# Altium PCB PCB_TestBoard.PcbDoc
Units mm, origin at the board's own origin, x right, y up, seen from the top; angles counter-clockwise.
Board outline 65 x 50 mm, 2 copper layers (Top Layer, Bottom Layer); 7 components, 65 nets, 151 pads, 16 vias.
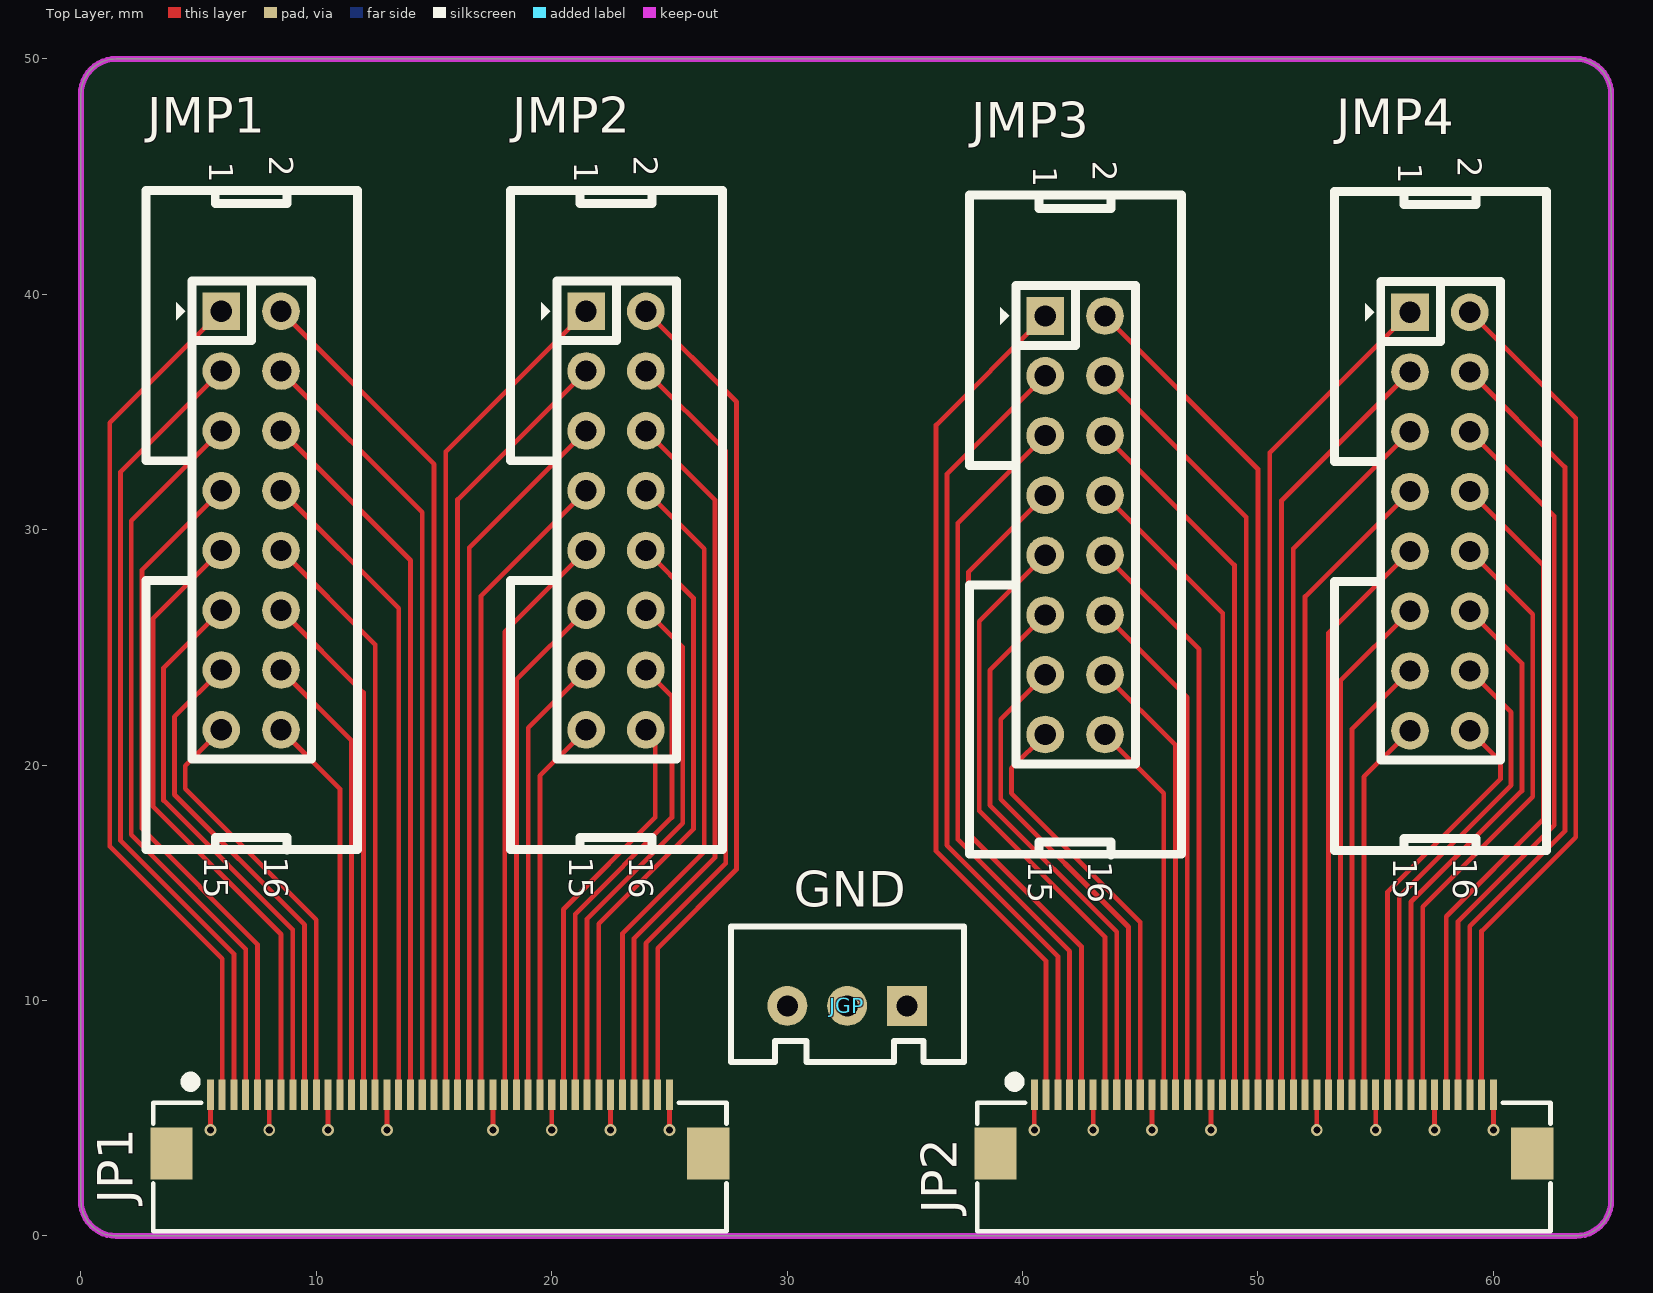
[diagram p0: Top Layer view]
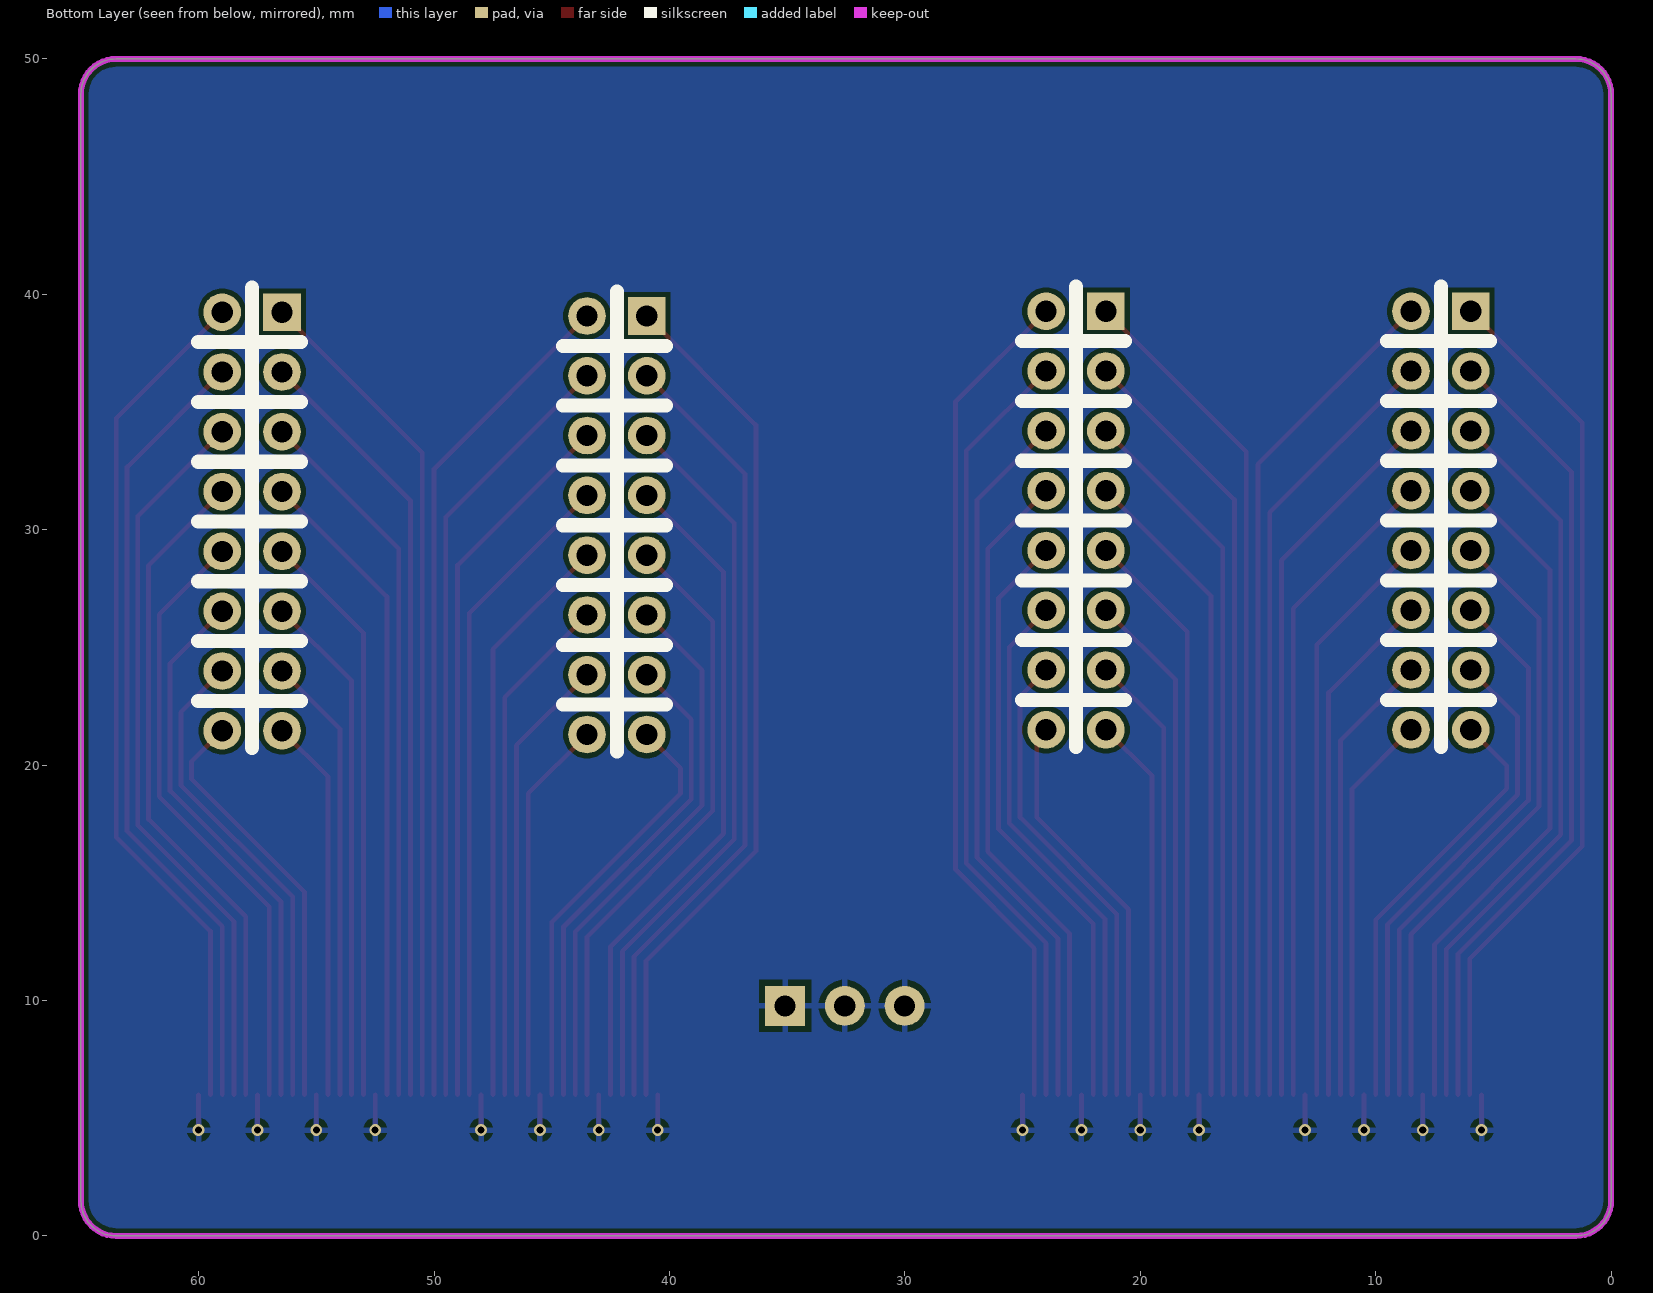
[diagram p1: Bottom Layer view, seen from below]
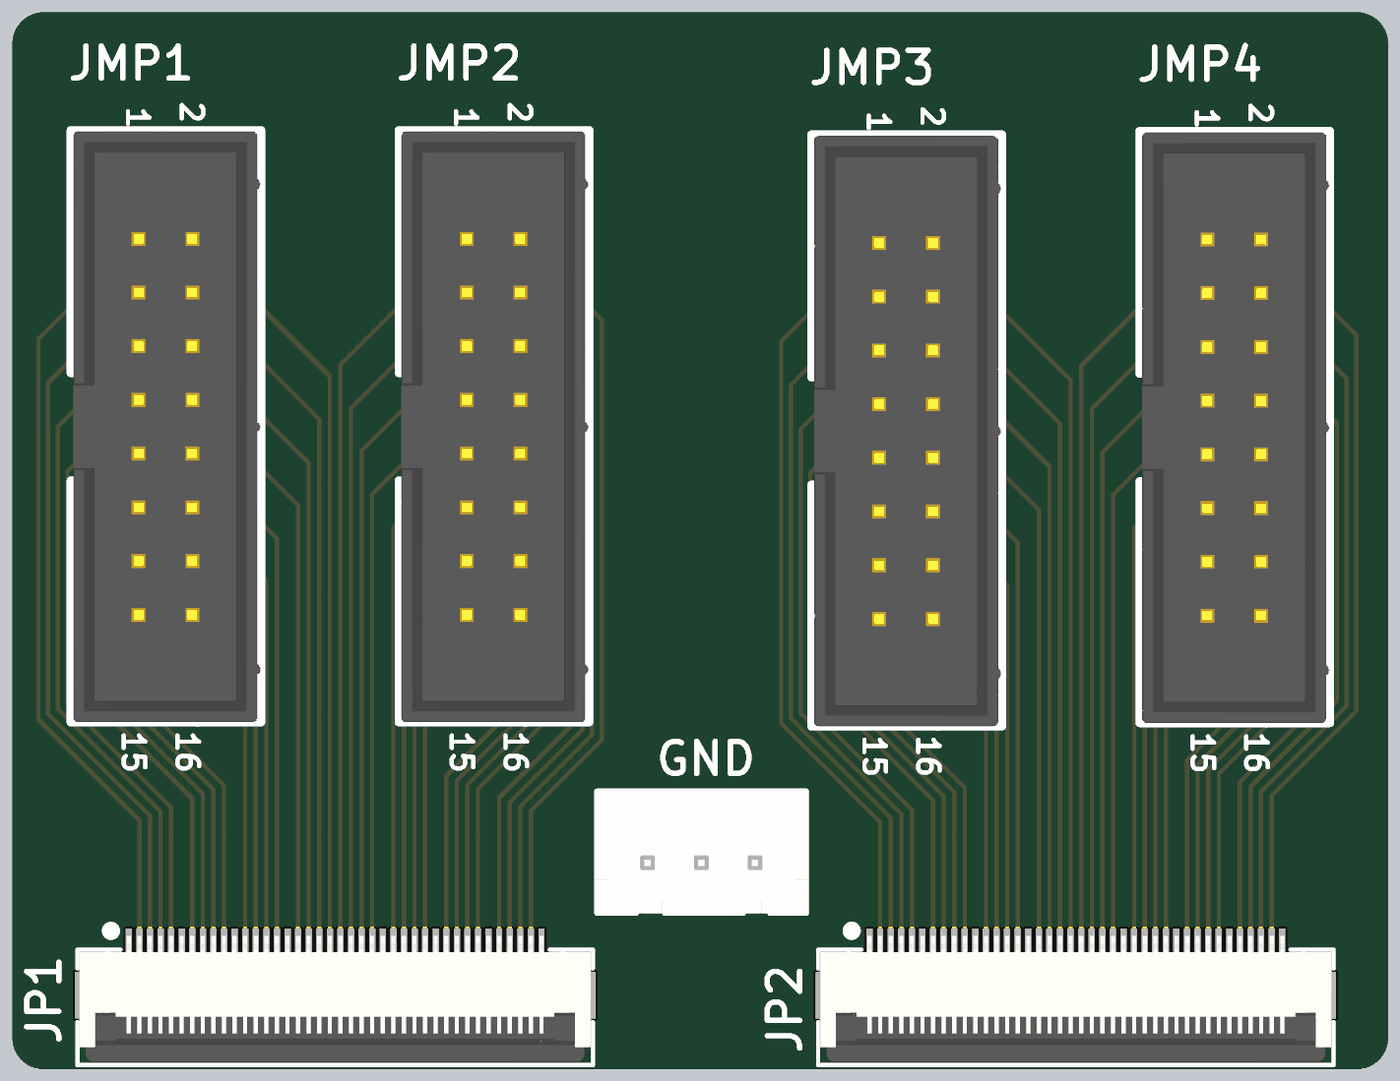
[diagram p2: 3D render of the assembled board from above, using the file's embedded part models]

## Layer stack, top to bottom
Top Solder: solder mask 0.0102, Solder Resist, Dk 3.5
Top Layer: signal copper 0.0356
Dielectric 1: dielectric 0.32, FR-4, Dk 4.8
Bottom Layer: signal copper 0.0356
Bottom Solder: solder mask 0.0102, Solder Resist, Dk 3.5

## Board outline
0,1.5 0,48.5 cw(c1.5,48.5) 1.5,50 63.5,50 cw(c63.5,48.5) 65,48.5 65,1.5 cw(c63.5,1.5) 63.5,0 1.5,0 cw(c1.5,1.5)

## Design rules (kind name [scope] priority, off if disabled: settings)
Clearance [All] p1: gap=0.203 ignorepadtopadclearanceinfootprint=TRUE except(0.254: Arc-Arc Arc-Track Track-Track)
HoleSize [All] p1: absolutevalues=TRUE maxlimit=3 minlimit=0.3 maxpercent=80.000 minpercent=20.000
PolygonConnect [All] p1: connectstyle=Relief reliefconductorwidth=0.254 reliefentries=4 polygonreliefangle="90 Angle" airgapwidth=0.254
RoutingVias [All] p1: holewidth=0.4 width=0.6 viastyle="Through Hole" minholewidth=0.3 minwidth=0.5 maxholewidth=3 maxwidth=3.3
SolderMaskExpansion [All] p1: expansion=0.102 istentingtop=FALSE
Width [All] p1: maxlimit=2.54 minlimit=0.203 preferedwidth=0.254
29 further rules are at their usual default settings.

## Components (designator, comment, footprint, x,y, rotation, side; value= is the part's Value field where it differs from the comment)
JGP "HDR-1X3" XH2.54-LI-3P 32.55,9.775 r180 top
JMP1 "Header 8X2" IDC2.54-LI-2x8P 5.96,39.28 r270 top
JMP2 "Header 8X2" IDC2.54-LI-2x8P 21.46,39.28 r270 top
JMP3 "Header 8X2" IDC2.54-LI-2x8P 40.96,39.08 r270 top
JMP4 "Header 8X2" IDC2.54-LI-2x8P 56.46,39.24 r270 top
JP1 "FPC-0.5mm-40P" "FPC0.5 2H-WS-40P" 15.25,3.503 r0 top
JP2 "FPC-0.5mm-40P" "FPC0.5 2H-WS-40P" 50.25,3.503 r0 top

## Footprints (in the part's own frame and the unit in brackets; to place one, negate y for a bottom-side part, rotate by r counter-clockwise, add the part's x,y. Pads: shape width x height; smd on the part's side, far side on the other; paste and mask are expansions set on the pad)
"FPC0.5 2H-WS-40P" [mm] "长：24.2mm，宽：5.2mm，高：2mm 淘宝ID:黄晶宝石   店铺网址:https://shop463601444.taobao.com"
  rect 1.8x2.2 smd: 0(-11.4,0) 0(11.4,0)
  rect 0.3x1.3 smd: 1(-9.75,2.497) 2(-9.25,2.497) 3(-8.75,2.497) 4(-8.25,2.497) 5(-7.75,2.497) 6(-7.25,2.497) 7(-6.75,2.497) 8(-6.25,2.497) 9(-5.75,2.497) 10(-5.25,2.497) 11(-4.75,2.497) 12(-4.25,2.497) 13(-3.75,2.497) 14(-3.25,2.497) 15(-2.75,2.497) 16(-2.25,2.497) 17(-1.75,2.497) 18(-1.25,2.497) 19(-0.75,2.497) 20(-0.25,2.497) 21(0.25,2.497) 22(0.75,2.497) 23(1.25,2.497) 24(1.75,2.497) 25(2.25,2.497) 26(2.75,2.497) 27(3.25,2.497) 28(3.75,2.497) 29(4.25,2.497) 30(4.75,2.497) 31(5.25,2.497) 32(5.75,2.497) 33(6.25,2.497) 34(6.75,2.497) 35(7.25,2.497) 36(7.75,2.497) 37(8.25,2.497) 38(8.75,2.497) 39(9.25,2.497) 40(9.75,2.497)
  silkscreen extent -12.17,-3.3 12.17,3.23, body extent -12.1,-3.15 12.1,2.85, height 2
IDC2.54-LI-2x8P [mm] "16P简易牛角座 淘宝ID:黄晶宝石   店铺网址:https://shop463601444.taobao.com"
  rect 1.6x1.6 hole 0.9: 1(0,0)
  round 1.6 hole 0.9: 2(0,2.54) 3(2.54,0) 4(2.54,2.54) 5(5.08,0) 6(5.08,2.54) 7(7.62,0) 8(7.62,2.54) 9(10.16,0) 10(10.16,2.54) 11(12.7,0) 12(12.7,2.54) 13(15.24,0) 14(15.24,2.54) 15(17.78,0) 16(17.78,2.54)
  silkscreen extent -5.14,-3.2 22.89,5.8, body extent -5.08,-3.08 22.86,5.77, height 9.17
XH2.54-LI-3P [mm] "接插件，3P  淘宝ID:黄晶宝石   店铺网址:https://shop463601444.taobao.com"
  rect 1.7x1.7 hole 0.9: 1(-2.54,0)
  round 1.7 hole 0.9: 2(0,0) 3(2.54,0)
  silkscreen extent -4.95,-3.38 4.93,2.39, body extent -5.04,-3.3 5.04,2.4, height 7.03

## Part data
JGP: library part "Header 3", "3P接插件", BOM名称=3P接插件, 学习资源=https://shop463601444.taobao.com, 版权归属="封装库来自淘宝 ID：黄晶宝石"
JMP1 JMP2 JMP3 JMP4: "8*2P接插件", BOM名称=8*2P接插件, 学习资源=https://shop463601444.taobao.com, 版权归属="封装库来自淘宝 ID：黄晶宝石"
JP1 JP2: "FPC Connector 0.5mm 40PIN"

## Via types
v1: diameter 0.5, hole 0.3, Top Layer to Bottom Layer, tented both sides, 16 vias

## Nets (pads, with @x,y where several pads share a name; then routed paths per layer and width w, separated by ;. In a path a pad name is that pad's centre, name@x,y a point inside that pad or via, vN(x,y) a via of type N, cw(c..) or ccw(c..) an arc to the next point about the centre after c; other vN are vias at no path point)
GND: JGP.1 JGP.2 JGP.3 JP1.1 JP1.6 JP1.11 JP1.16 JP1.25 JP1.30 JP1.35 JP1.40 JP2.1 JP2.6 JP2.11 JP2.16 JP2.25 JP2.30 JP2.35 JP2.40 | length 24
  Top Layer w0.203: v1(5.5,4.5) JP1.1 ; v1(8,4.5) JP1.6 ; v1(10.5,4.5) JP1.11 ; v1(13,4.5) JP1.16 ; v1(17.5,4.5) JP1.25 ; v1(20,4.5) JP1.30 ; v1(22.5,4.5) JP1.35 ; v1(25,4.5) JP1.40 ; v1(40.5,4.5) JP2.1 ; v1(43,4.5) JP2.6 ; v1(45.5,4.5) JP2.11 ; v1(48,4.5) JP2.16 ; v1(52.5,4.5) JP2.25 ; v1(55,4.5) JP2.30 ; v1(57.5,4.5) JP2.35 ; v1(60,4.5) JP2.40
S1: JMP1.1 JP1.2 | length 37.2
  Top Layer w0.203: JMP1.1 1.228,34.548 1.228,16.547 6,11.775 JP1.2
S2: JMP1.3 JP1.3 | length 34.5
  Top Layer w0.203: JMP1.3 1.685,32.465 1.685,16.797 6.5,11.982 JP1.3
S3: JMP1.5 JP1.4 | length 31.8
  Top Layer w0.203: JMP1.5 2.142,30.382 2.142,17.047 7,12.189 JP1.4
S4: JMP1.7 JP1.5 | length 29.1
  Top Layer w0.203: JMP1.7 2.6,28.3 2.6,17.297 7.5,12.396 JP1.5
S5: JMP1.9 JP1.7 | length 26.6
  Top Layer w0.203: JMP1.9 3.057,26.217 3.057,18.254 8.5,12.811 JP1.7
S6: JMP1.11 JP1.8 | length 23.9
  Top Layer w0.203: JMP1.11 3.514,24.134 3.514,18.504 9,13.018 JP1.8
S7: JMP1.13 JP1.9 | length 21.2
  Top Layer w0.203: JMP1.13 3.971,22.051 3.971,18.754 9.5,13.225 JP1.9
S8: JMP1.15 JP1.10 | length 18.4
  Top Layer w0.203: JMP1.15 4.428,19.968 4.428,19.003 10,13.432 JP1.10
S9: JMP1.16 JP1.12 | length 16.5
  Top Layer w0.203: JMP1.16 11,19 JP1.12
S10: JMP1.14 JP1.13 | length 19.3
  Top Layer w0.203: JMP1.14 11.5,21.04 JP1.13
S11: JMP1.12 JP1.14 | length 22
  Top Layer w0.203: JMP1.12 12,23.08 JP1.14
S12: JMP1.10 JP1.15 | length 24.8
  Top Layer w0.203: JMP1.10 12.5,25.12 JP1.15
S13: JMP1.8 JP1.17 | length 27.7
  Top Layer w0.203: JMP1.8 13.5,26.66 JP1.17
S14: JMP1.6 JP1.18 | length 30.5
  Top Layer w0.203: JMP1.6 14,28.7 JP1.18
S15: JMP1.4 JP1.19 | length 33.2
  Top Layer w0.203: JMP1.4 14.5,30.74 JP1.19
S16: JMP1.2 JP1.20 | length 36
  Top Layer w0.203: JMP1.2 15,32.78 JP1.20
S17: JMP2.1 JP1.21 | length 35.7
  Top Layer w0.203: JP1.21 15.5,33.32 JMP2.1
S18: JMP2.3 JP1.22 | length 33
  Top Layer w0.203: JP1.22 16,31.28 JMP2.3
S19: JMP2.5 JP1.23 | length 30.3
  Top Layer w0.203: JP1.23 16.5,29.24 JMP2.5
S20: JMP2.7 JP1.24 | length 27.5
  Top Layer w0.203: JP1.24 17,27.2 JMP2.7
S21: JMP2.9 JP1.26 | length 24.6
  Top Layer w0.203: JP1.26 18,25.66 JMP2.9
S22: JMP2.11 JP1.27 | length 21.8
  Top Layer w0.203: JP1.27 18.5,23.62 JMP2.11
S23: JMP2.13 JP1.28 | length 19.1
  Top Layer w0.203: JP1.28 19,21.58 JMP2.13
S24: JMP2.15 JP1.29 | length 16.3
  Top Layer w0.203: JP1.29 19.5,19.54 JMP2.15
S25: JMP2.16 JP1.31 | length 17.3
  Top Layer w0.203: JP1.31 20.5,13.882 24.397,17.778 24.397,21.103 JMP2.16
S26: JMP2.14 JP1.32 | length 20.2
  Top Layer w0.203: JP1.32 21,13.675 25.105,17.78 25.105,22.935 JMP2.14
S27: JMP2.12 JP1.33 | length 22.9
  Top Layer w0.203: JP1.33 21.5,13.468 25.562,17.53 25.562,25.018 JMP2.12
S28: JMP2.10 JP1.34 | length 25.6
  Top Layer w0.203: JP1.34 22,13.261 26.019,17.28 26.019,27.101 JMP2.10
S29: JMP2.8 JP1.36 | length 28.1
  Top Layer w0.203: JP1.36 23,12.846 26.476,16.323 26.476,29.184 JMP2.8
S30: JMP2.6 JP1.37 | length 30.8
  Top Layer w0.203: JP1.37 23.5,12.639 26.934,16.073 26.934,31.266 JMP2.6
S31: JMP2.4 JP1.38 | length 33.5
  Top Layer w0.203: JP1.38 24,12.432 27.391,15.823 27.391,33.349 JMP2.4
S32: JMP2.2 JP1.39 | length 36.3
  Top Layer w0.203: JMP2.2 27.848,35.432 27.848,15.573 24.5,12.225 JP1.39
S33: JMP3.1 JP2.2 | length 36.9
  Top Layer w0.203: JMP3.1 36.328,34.448 36.328,16.347 41,11.675 JP2.2
S34: JMP3.3 JP2.3 | length 34.2
  Top Layer w0.203: JMP3.3 36.785,32.365 36.785,16.597 41.5,11.882 JP2.3
S35: JMP3.5 JP2.4 | length 31.5
  Top Layer w0.203: JMP3.5 37.242,30.282 37.242,16.847 42,12.089 JP2.4
S36: JMP3.7 JP2.5 | length 28.8
  Top Layer w0.203: JMP3.7 37.7,28.2 37.7,17.097 42.5,12.296 JP2.5
S37: JMP3.9 JP2.7 | length 26.3
  Top Layer w0.203: JMP3.9 38.157,26.117 38.157,18.054 43.5,12.711 JP2.7
S38: JMP3.11 JP2.8 | length 23.6
  Top Layer w0.203: JMP3.11 38.614,24.034 38.614,18.304 44,12.918 JP2.8
S39: JMP3.13 JP2.9 | length 20.9
  Top Layer w0.203: JMP3.13 39.071,21.951 39.071,18.554 44.5,13.125 JP2.9
S40: JMP3.15 JP2.10 | length 18.2
  Top Layer w0.203: JMP3.15 39.528,19.868 39.528,18.803 45,13.332 JP2.10
S41: JMP3.16 JP2.12 | length 16.3
  Top Layer w0.203: JMP3.16 46,18.8 JP2.12
S42: JMP3.14 JP2.13 | length 19.1
  Top Layer w0.203: JMP3.14 46.5,20.84 JP2.13
S43: JMP3.12 JP2.14 | length 21.8
  Top Layer w0.203: JMP3.12 47,22.88 JP2.14
S44: JMP3.10 JP2.15 | length 24.6
  Top Layer w0.203: JMP3.10 47.5,24.92 JP2.15
S45: JMP3.8 JP2.17 | length 27.5
  Top Layer w0.203: JMP3.8 48.5,26.46 JP2.17
S46: JMP3.6 JP2.18 | length 30.3
  Top Layer w0.203: JMP3.6 49,28.5 JP2.18
S47: JMP3.4 JP2.19 | length 33
  Top Layer w0.203: JMP3.4 49.5,30.54 JP2.19
S48: JMP3.2 JP2.20 | length 35.8
  Top Layer w0.203: JMP3.2 50,32.58 JP2.20
S49: JMP4.1 JP2.21 | length 35.7
  Top Layer w0.203: JP2.21 50.5,33.28 JMP4.1
S50: JMP4.3 JP2.22 | length 33
  Top Layer w0.203: JP2.22 51,31.24 JMP4.3
S51: JMP4.5 JP2.23 | length 30.2
  Top Layer w0.203: JP2.23 51.5,29.2 JMP4.5
S52: JMP4.7 JP2.24 | length 27.5
  Top Layer w0.203: JP2.24 52,27.16 JMP4.7
S53: JMP4.9 JP2.26 | length 24.5
  Top Layer w0.203: JP2.26 53,25.62 JMP4.9
S54: JMP4.11 JP2.27 | length 21.8
  Top Layer w0.203: JP2.27 53.5,23.58 JMP4.11
S55: JMP4.13 JP2.28 | length 19
  Top Layer w0.203: JP2.28 54,21.54 JMP4.13
S56: JMP4.15 JP2.29 | length 16.3
  Top Layer w0.203: JP2.29 54.5,19.5 JMP4.15
S57: JMP4.16 JP2.31 | length 18
  Top Layer w0.203: JP2.31 55.5,14.607 60.297,19.403 60.297,20.163 JMP4.16
S58: JMP4.14 JP2.32 | length 20.7
  Top Layer w0.203: JP2.32 56,14.4 60.754,19.154 60.754,22.246 JMP4.14
S59: JMP4.12 JP2.33 | length 23.4
  Top Layer w0.203: JP2.33 56.5,14.193 61.211,18.904 61.211,24.329 JMP4.12
S60: JMP4.10 JP2.34 | length 26.1
  Top Layer w0.203: JP2.34 57,13.986 61.668,18.654 61.668,26.412 JMP4.10
S61: JMP4.8 JP2.36 | length 28.6
  Top Layer w0.203: JP2.36 58,13.571 62.125,17.697 62.125,28.495 JMP4.8
S62: JMP4.6 JP2.37 | length 31.3
  Top Layer w0.203: JP2.37 58.5,13.364 62.583,17.447 62.583,30.577 JMP4.6
S63: JMP4.4 JP2.38 | length 34
  Top Layer w0.203: JP2.38 59,13.157 63.04,17.197 63.04,32.66 JMP4.4
S64: JMP4.2 JP2.39 | length 36.8
  Top Layer w0.203: JMP4.2 63.497,34.743 63.497,16.947 59.5,12.95 JP2.39
pads on no net: JP1.0 JP2.0

## Polygon pours and split planes (outlines as drawn)
GND on Bottom Layer "GND_L02_P000" (solid, remove dead copper, pour order 0): 0,50 0,0 65,0 65,50

## Keep-outs
Keep-Out Layer:
  the board outline again, w0.254

## Silkscreen, mask and mechanical layers (free items; w line width, h text height)
Top Overlay:
  text "GND" at 30.279,13.979 h1.52
Drill Drawing:
  text ".Legend" at 78.254,47.762 h1.52

## Text inside footprints (layer, text, board x,y; h text height)
JMP1: Top Overlay "15" at 5.249,16.115 h1.02 r270; Top Overlay "16" at 7.789,16.115 h1.02 r270; Top Overlay "1" at 5.452,45.63 h1.02 r270; Top Overlay "2" at 7.992,45.884 h1.02 r270
JMP2: Top Overlay "15" at 20.749,16.115 h1.02 r270; Top Overlay "16" at 23.289,16.115 h1.02 r270; Top Overlay "1" at 20.952,45.63 h1.02 r270; Top Overlay "2" at 23.492,45.884 h1.02 r270
JMP3: Top Overlay "15" at 40.249,15.915 h1.02 r270; Top Overlay "16" at 42.789,15.915 h1.02 r270; Top Overlay "1" at 40.452,45.43 h1.02 r270; Top Overlay "2" at 42.992,45.684 h1.02 r270
JMP4: Top Overlay "15" at 55.749,16.075 h1.02 r270; Top Overlay "16" at 58.289,16.075 h1.02 r270; Top Overlay "1" at 55.952,45.59 h1.02 r270; Top Overlay "2" at 58.492,45.844 h1.02 r270